# EAGLE board panel_V1_20150125 (EAGLE 6.5.0), part 1 of 3
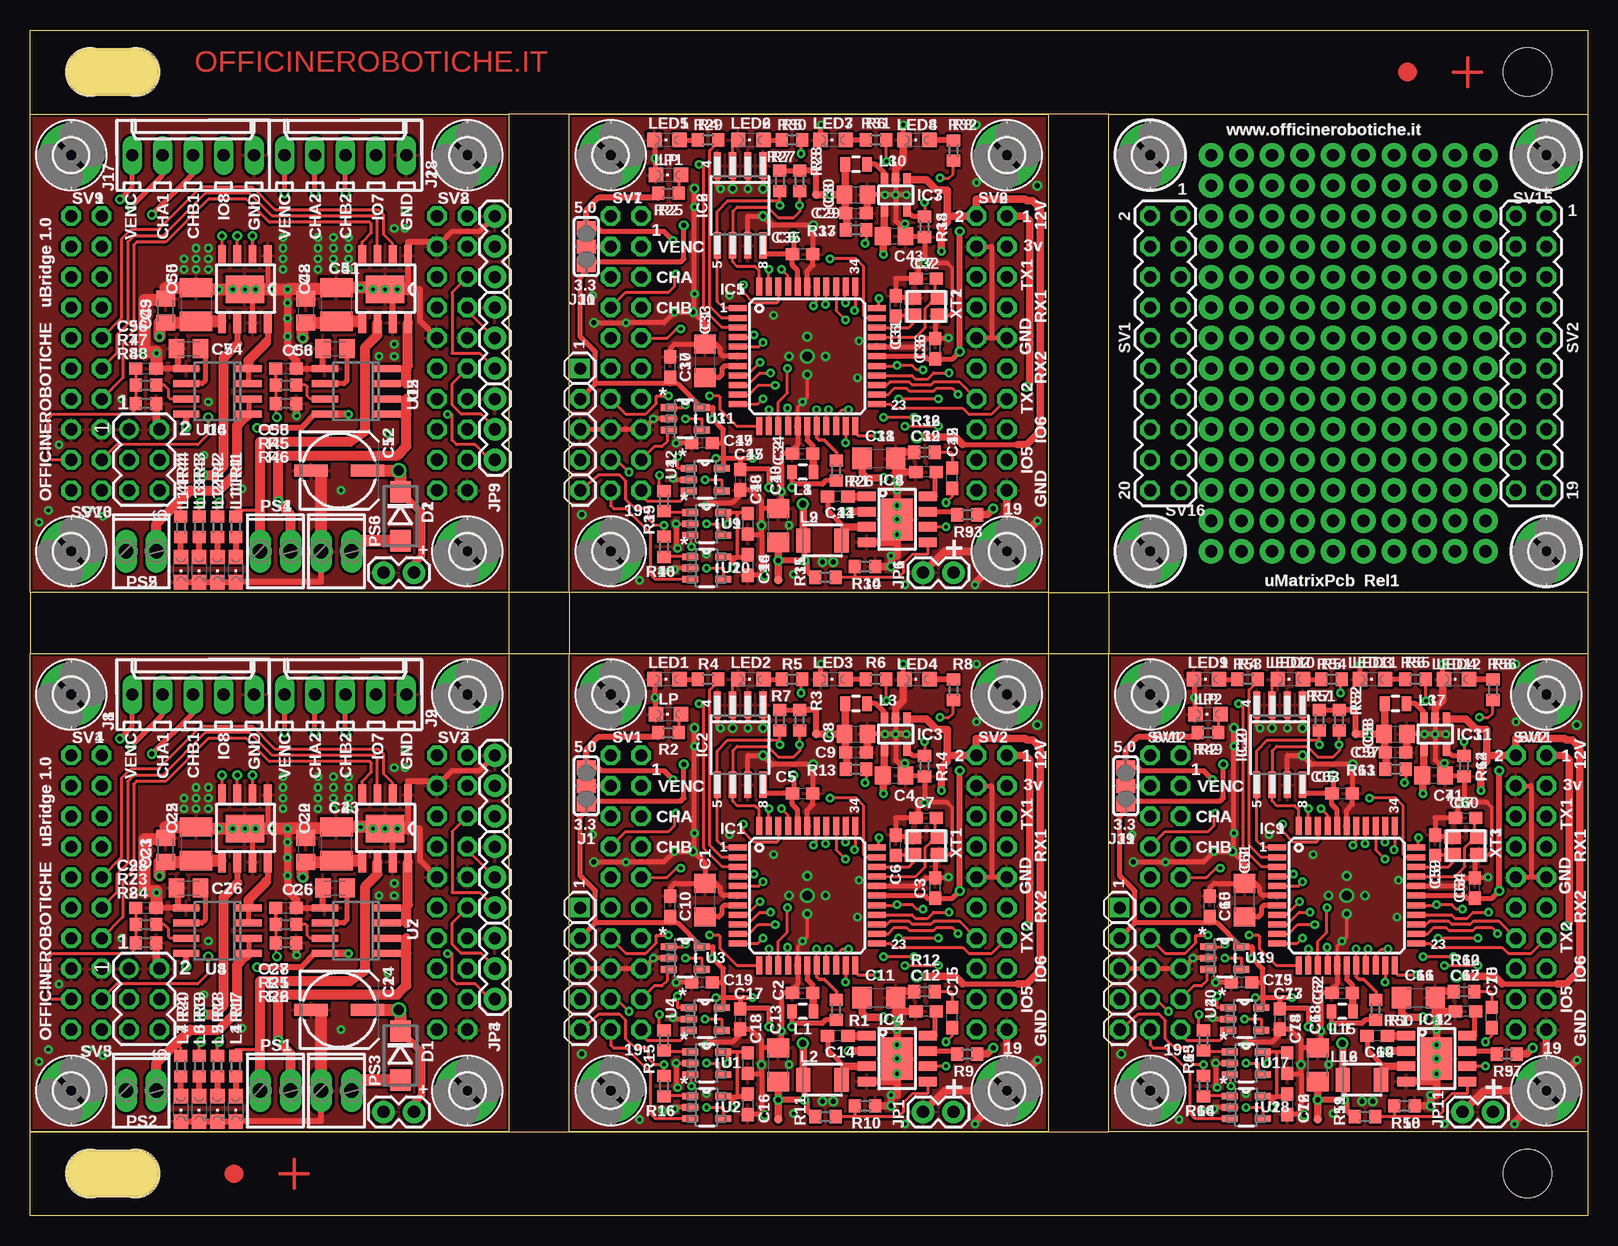
[diagram p0: board, top side]
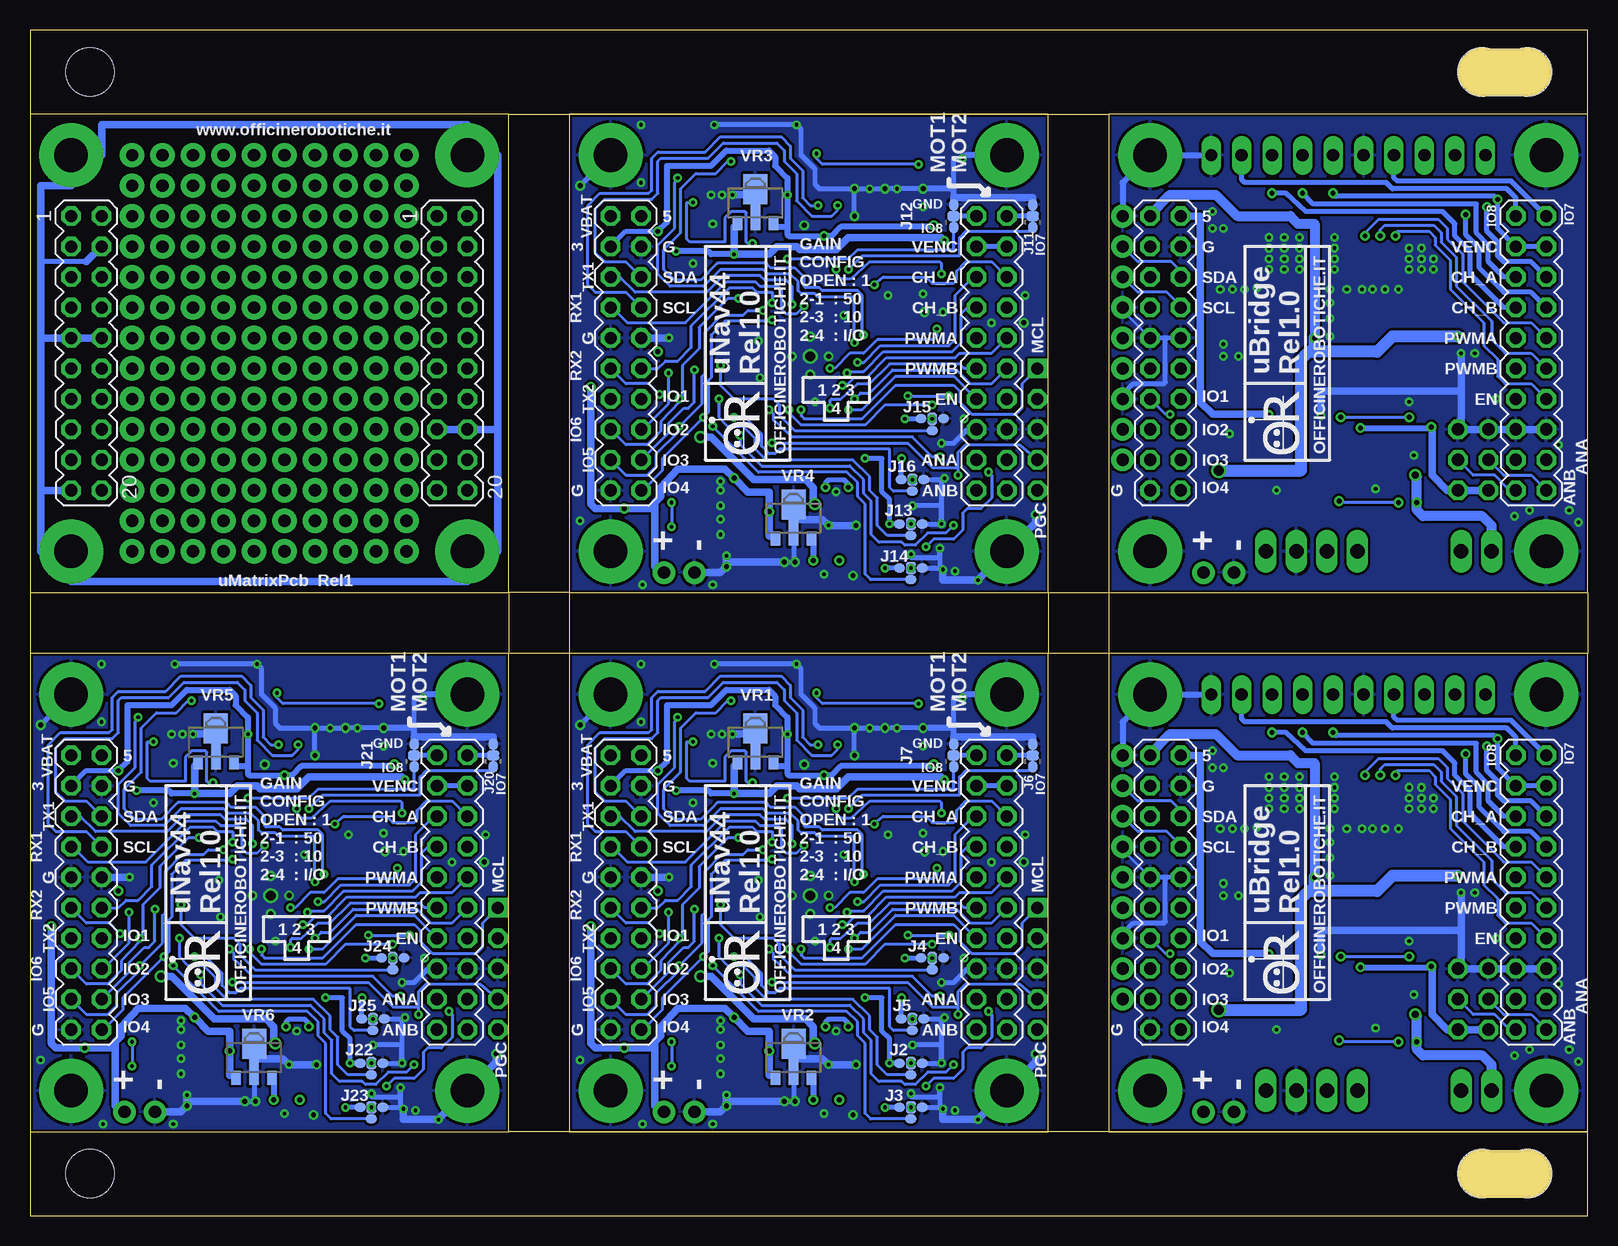
[diagram p1: board, bottom side, seen from below]

Size 129.79 x 98.86 mm. Coordinates in mm from the lower left corner, seen from the top.
Outline: 44.96,46.89 44.96,7.01 84.84,7.01 84.84,46.89
Outline: 44.96,46.89 84.84,46.89
Outline: 0,7.01 39.88,7.01 39.88,46.89
Outline: 0,7.01 0,46.89
Outline: 84.84,51.97 44.96,51.97
Outline: 44.96,51.97 44.96,91.85 84.84,91.85 84.84,51.97
Outline: 0,51.97 0,91.85
Outline: 0,91.85 39.88,91.85
Outline: 39.88,91.85 39.88,51.97
Outline: 129.79,7.01 89.92,7.01
Outline: 89.92,7.01 89.92,46.89
Outline: 89.92,46.89 129.79,46.89
Outline: 129.79,46.89 129.79,7.01
Outline: 89.92,91.85 39.88,91.85
Outline: 0,91.85 0,91.85
Outline: 0,91.85 0,98.86 129.79,98.86 129.79,91.85
Outline: 0,7.01 0,0 129.79,0 129.79,7.01
Outline: 0,7.01 89.92,7.01
Outline: 0,51.97 0,46.89
Outline: 0,46.89 39.88,46.89
Outline: 39.88,46.89 44.96,46.89
Outline: 84.84,46.89 89.92,46.89
Outline: 44.96,51.97 39.88,51.97
Outline: 39.88,51.97 0,51.97
Outline: 39.88,51.97 39.88,46.89
Outline: 44.96,51.97 44.96,46.91
Outline: 84.84,51.97 84.84,46.89
Outline: 129.79,51.97 89.92,51.97
Outline: 89.92,51.97 89.92,91.85
Outline: 89.92,91.85 129.79,91.85
Outline: 129.79,91.85 129.79,51.97
Outline: 84.84,51.97 89.92,51.97
Outline: 89.92,51.97 89.92,46.89
Outline: 129.79,51.97 129.79,46.89
Copper layers (1*16): Top 0.035mm / dielectric 1.5mm / Bottom 0.035mm
Design rules "Pannel": minimum track width 8mil, minimum drill 12mil, track to track 8mil, track to pad 8mil, pad to pad 8mil, via to via 8mil, smd to smd 8mil, copper to edge 8mil, drill to drill 8mil, minimum pad ring 12mil, minimum via ring 8mil, stop-mask expansion 4mil, vias tented up to drill 20mil, thermal gap 10mil
Net classes: 0 default: width 0.254 mm, drill 0.406 mm, clearance 0.178 mm
Holes 4 mm at 124.79,95.35 8.8,95.35 5,95.35 124.79,3.52 8.8,3.52 5,3.52
tRestrict: area 113.3,93.8 to 116.3,96.8; area 118.3,93.8 to 121.3,96.8; area 15.5,2 to 18.5,5; area 20.5,2 to 23.5,5; 2 lines
bRestrict: area 113.3,93.8 to 116.3,96.8; area 118.3,93.8 to 121.3,96.8; area 15.5,2 to 18.5,5; area 20.5,2 to 23.5,5; 2 lines
Milling: 2 lines

## Footprints (pad centres in the part's own frame; a part is rotated, then mirrored left to right if it is on the bottom)
C1206 = smd 1.6 x 1.8: 1 -1.4,0; 2 1.4,0
C0603 = smd 1.1 x 1: 1 -0.85,0; 2 0.85,0
C0805 = smd 1.3 x 1.5: 1 -0.95,0; 2 0.95,0
C0805K = smd 1.3 x 1.6: 1 -1,0; 2 1,0
C3225 = smd 1.6 x 2.7: 1 -1.4,0; 2 1.4,0
UD-6,3X7,7_NICHICON = smd 2.8 x 1: + 2.35,0; - -2.35,0
DO214BA = smd 1.8 x 1.7: A 2.05,0; C -2.05,0
2,8-PAD = drill 2.8 pad 5.334: B2,8 0,0
TQFP44 = smd 1.5 x 0.5: 1 -5.8,4; 2 -5.8,3.2; 3 -5.8,2.4; 4 -5.8,1.6; 5 -5.8,0.8; 6 -5.8,0; 7 -5.8,-0.8; 8 -5.8,-1.6; 9 -5.8,-2.4; 10 -5.8,-3.2; 11 -5.8,-4; 23 5.8,-4; 24 5.8,-3.2; 25 5.8,-2.4; 26 5.8,-1.6; 27 5.8,-0.8; 28 5.8,0; 29 5.8,0.8; 30 5.8,1.6; 31 5.8,2.4; 32 5.8,3.2; 33 5.8,4 | smd 0.5 x 1.5: 12 -4,-5.8; 13 -3.2,-5.8; 14 -2.4,-5.8; 15 -1.6,-5.8; 16 -0.8,-5.8; 17 0,-5.8; 18 0.8,-5.8; 19 1.6,-5.8; 20 2.4,-5.8; 21 3.2,-5.8; 22 4,-5.8; 34 4,5.8; 35 3.2,5.8; 36 2.4,5.8; 37 1.6,5.8; 38 0.8,5.8; 39 0,5.8; 40 -0.8,5.8; 41 -1.6,5.8; 42 -2.4,5.8; 43 -3.2,5.8; 44 -4,5.8
SO-08M = smd 0.6 x 2.2: 1 -1.905,-3.33; 2 -0.635,-3.33; 3 0.635,-3.33; 4 1.905,-3.33; 5 1.905,3.33; 6 0.635,3.33; 7 -0.635,3.33; 8 -1.905,3.33
SOT-23-5 = smd 0.61 x 0.991: 1 -0.94,-1.308; 2 0,-1.308; 3 0.94,-1.308; 4 0.94,1.308; 5 -0.94,1.308
SO-8EP = smd 0.802 x 1.505: 1 -1.905,-2.54; 2 -0.635,-2.54; 3 0.635,-2.54; 4 1.905,-2.54; 5 1.905,2.54; 6 0.635,2.54; 7 -0.635,2.54; 8 -1.905,2.54 | smd 3.501 x 2.613: PAD 0,0
1X05-S = drill 1.016 square: 1 -5.08,0 | drill 1.016 octagon: 2 -2.54,0; 3 0,0; 4 2.54,0; 5 5.08,0
SJ_2 = smd 1.168 x 1.6: 1 -1.524,0; 2 0,0; 3 1.524,0
C0R-JUMP-4 = smd 0.8 x 0.95: 1 0,0.94; 3 0,-0.94; 4 -0.965,0 | smd 1 x 0.8: 2 0,0
C0R-JMP = smd 0.8 x 1: 1 0,0.938; 3 0,-0.938 | smd 1 x 0.8: 2 0,0
6410-05 = drill 1.016 long: 1 5.08,0; 2 2.54,0; 3 0,0; 4 -2.54,0; 5 -5.08,0
1X02 = drill 1.016 pad 1.88: 1 0,0; 2 2.54,0
1X03 = drill 1.016 pad 1.88: 1 0,0; 2 2.54,0; 3 5.08,0
0805 = smd 0.8 x 1.2: 1 -0.9,0; 2 0.9,0
1210 = smd 1.2 x 2: 1 -1.6,0; 2 1.6,0
CHIPLED_0805 = smd 1.2 x 1.2: A 0,-1.05; C 0,1.05
2POL254 = drill 1.2 long: 1 -1.27,0; 2 1.27,0
R0603 = smd 1 x 1.1: 1 -0.85,0; 2 0.85,0
MA10-2 = drill 1.016 octagon: 1 -11.43,-1.27; 2 -11.43,1.27; 3 -8.89,-1.27; 4 -8.89,1.27; 5 -6.35,-1.27; 6 -6.35,1.27; 7 -3.81,-1.27; 8 -3.81,1.27; 9 -1.27,-1.27; 10 -1.27,1.27; 11 1.27,-1.27; 12 1.27,1.27; 13 3.81,-1.27; 14 3.81,1.27; 15 6.35,-1.27; 16 6.35,1.27; 17 8.89,-1.27; 18 8.89,1.27; 19 11.43,-1.27; 20 11.43,1.27
MA03-2 = drill 1.016: 1 -2.54,-1.27 | drill 1.016 octagon: 2 -2.54,1.27; 3 0,-1.27; 4 0,1.27; 5 2.54,-1.27; 6 2.54,1.27
TP07R = smd 0.7 x 0.7: TP 0,0
SOT95P300X145-5N = smd 1.321 x 0.559: 1 -1.372,0.94; 2 -1.372,0; 3 -1.372,-0.94; 4 1.372,-0.94; 5 1.372,0.94
8SOICN = smd 0.65 x 1.75: 1 -1.905,-2.8; 2 -0.635,-2.8; 3 0.635,-2.8; 4 1.905,-2.8; 5 1.905,2.8; 6 0.635,2.8; 7 -0.635,2.8; 8 -1.905,2.8 | smd 3.2 x 2.3: PAD 0,0
SO08 = smd 0.6 x 2.2: 1 -1.905,-2.6; 2 -0.635,-2.6; 3 0.635,-2.6; 4 1.905,-2.6; 5 1.905,2.6; 6 0.635,2.6; 7 -0.635,2.6; 8 -1.905,2.6
SOT89 = smd 0.8 x 1.2: 1 -1.5,-1.6; 3 1.5,-1.6 | smd 0.8 x 2.3: 2 0,-1.05 | smd 2 x 2.5: 4 0,1.25
CTS_32X25 = smd 1.4 x 1.2: 1 -1.1,-0.7; 2 1.1,-0.7; 3 1.1,0.8; 4 -1.1,0.8

## Placement (x,y rotation side)
C1  10uf  [C1206]  56.26,26.31 90 top
C2  100nF/S  [C0603]  64.39,18.57 0 top
C3  100nF/S  [C0603]  75.44,27.33 90 top
C4  10uF 10V X7R  [C0805]  72.01,36.73 0 top
C5  100nF/S  [C0603]  64.39,35.2 180 top
C6  18pf  [C0603]  72.14,30.89 90 top
C7  18pf  [C0603]  74.68,33.17 0 top
C8  10uF 10V X7R  [C0805]  68.83,40.16 0 top
C9  100nF/S  [C0603]  68.83,38.63 0 top
C10  100nF/S  [C0603]  53.34,25.81 90 top
C11  22uF 35V 20% JB 1206  [C1206]  70.74,18.19 0 top
C12  100nF/S2  [C0603]  74.68,17.04 180 top
C13  22uf  [C1206]  62.36,12.6 90 top
C14  10nF/S  [C0603]  67.31,15.01 180 top
C15  10nF/S2  [C0603]  76.84,16.54 90 top
C16  100nF/S  [C0603]  59.82,9.3 270 top
C17  100nF/S  [C0603]  59.18,16.41 270 top
C18  100nF/S  [C0603]  59.82,12.73 270 top
C19  100nF/S  [C0603]  56.01,19.46 180 top
C20  220nF  [C0805K]  22.99,30.51 270 top
C21  220nF  [C0805K]  11.3,30.51 270 top
C22  10uF/S6 50V  [C3225]  13.84,31.01 270 top
C23  10uF/S6 50V  [C3225]  25.53,31.01 270 top
C24  PCE4554CT-ND  [UD-6,3X7,7_NICHICON]  25.78,17.17 0 top
C25  1nF  [C0805K]  25.4,27.33 180 top
C26  1nF  [C0805K]  13.21,27.33 180 top
C27  100nF/S2  [C0603]  21.34,25.68 0 top
C28  100nF/S2  [C0603]  9.65,25.68 0 top
C29  100nF/S  [C0603]  68.83,83.59 0 top
C30  10uF 10V X7R  [C0805]  68.83,85.12 0 top
C31  18pf  [C0603]  72.14,75.84 90 top
C32  18pf  [C0603]  74.68,78.13 0 top
C33  10uf  [C1206]  56.26,71.27 90 top
C34  100nF/S  [C0603]  64.39,63.53 0 top
C35  100nF/S  [C0603]  64.39,80.16 180 top
C36  100nF/S  [C0603]  75.44,72.29 90 top
C37  100nF/S  [C0603]  53.34,70.76 90 top
C38  22uF 35V 20% JB 1206  [C1206]  70.74,63.14 0 top
C39  100nF/S2  [C0603]  74.68,62 180 top
C40  22uf  [C1206]  62.36,57.56 90 top
C41  10nF/S  [C0603]  67.31,59.97 180 top
C42  10nF/S2  [C0603]  76.84,61.49 90 top
C43  10uF 10V X7R  [C0805]  72.01,81.69 0 top
C44  100nF/S  [C0603]  59.82,54.25 270 top
C45  100nF/S  [C0603]  59.18,61.37 270 top
C46  100nF/S  [C0603]  59.82,57.68 270 top
C47  100nF/S  [C0603]  56.01,64.41 180 top
C48  220nF  [C0805K]  22.99,75.46 270 top
C49  220nF  [C0805K]  11.3,75.46 270 top
C50  10uF/S6 50V  [C3225]  13.84,75.97 270 top
C51  10uF/S6 50V  [C3225]  25.53,75.97 270 top
C52  PCE4554CT-ND  [UD-6,3X7,7_NICHICON]  25.78,62.13 0 top
C53  1nF  [C0805K]  25.4,72.29 180 top
C54  1nF  [C0805K]  13.21,72.29 180 top
C55  100nF/S2  [C0603]  21.34,70.64 0 top
C56  100nF/S2  [C0603]  9.65,70.64 0 top
C57  100nF/S  [C0603]  113.79,38.63 0 top
C58  10uF 10V X7R  [C0805]  113.79,40.16 0 top
C59  18pf  [C0603]  117.09,30.89 90 top
C60  18pf  [C0603]  119.63,33.17 0 top
C61  10uf  [C1206]  101.22,26.31 90 top
C62  100nF/S  [C0603]  109.35,18.57 0 top
C63  100nF/S  [C0603]  109.35,35.2 180 top
C64  100nF/S  [C0603]  120.4,27.33 90 top
C65  100nF/S  [C0603]  98.3,25.81 90 top
C66  22uF 35V 20% JB 1206  [C1206]  115.7,18.19 0 top
C67  100nF/S2  [C0603]  119.63,17.04 180 top
C68  22uf  [C1206]  107.32,12.6 90 top
C69  10nF/S  [C0603]  112.27,15.01 180 top
C70  10nF/S2  [C0603]  121.79,16.54 90 top
C71  10uF 10V X7R  [C0805]  116.97,36.73 0 top
C72  100nF/S  [C0603]  104.78,9.3 270 top
C73  100nF/S  [C0603]  104.14,16.41 270 top
C74  100nF/S  [C0603]  104.78,12.73 270 top
C75  100nF/S  [C0603]  100.97,19.46 180 top
D1  ES1G-E2  [DO214BA]  30.86,13.36 270 top
D2  ES1G-E2  [DO214BA]  30.86,58.32 270 top
H1  MOUNT-PAD-ROUND2.8  [2,8-PAD]  48.39,10.44 0 top
H2  MOUNT-PAD-ROUND2.8  [2,8-PAD]  81.41,10.44 0 top
H3  MOUNT-PAD-ROUND2.8  [2,8-PAD]  81.41,43.46 0 top
H4  MOUNT-PAD-ROUND2.8  [2,8-PAD]  48.39,43.46 0 top
H5  MOUNT-PAD-ROUND2.8  [2,8-PAD]  3.43,10.44 0 top
H6  MOUNT-PAD-ROUND2.8  [2,8-PAD]  36.45,10.44 0 top
H7  MOUNT-PAD-ROUND2.8  [2,8-PAD]  36.45,43.46 0 top
H8  MOUNT-PAD-ROUND2.8  [2,8-PAD]  3.43,43.46 0 top
H9  MOUNT-PAD-ROUND2.8  [2,8-PAD]  48.39,55.4 0 top
H10  MOUNT-PAD-ROUND2.8  [2,8-PAD]  81.41,55.4 0 top
H11  MOUNT-PAD-ROUND2.8  [2,8-PAD]  81.41,88.42 0 top
H12  MOUNT-PAD-ROUND2.8  [2,8-PAD]  48.39,88.42 0 top
H13  MOUNT-PAD-ROUND2.8  [2,8-PAD]  3.43,55.4 0 top
H14  MOUNT-PAD-ROUND2.8  [2,8-PAD]  36.45,55.4 0 top
H15  MOUNT-PAD-ROUND2.8  [2,8-PAD]  36.45,88.42 0 top
H16  MOUNT-PAD-ROUND2.8  [2,8-PAD]  3.43,88.42 0 top
H17  MOUNT-PAD-ROUND2.8  [2,8-PAD]  93.35,10.44 0 top
H18  MOUNT-PAD-ROUND2.8  [2,8-PAD]  126.37,10.44 0 top
H19  MOUNT-PAD-ROUND2.8  [2,8-PAD]  126.37,43.46 0 top
H20  MOUNT-PAD-ROUND2.8  [2,8-PAD]  93.35,43.46 0 top
H25  MOUNT-PAD-ROUND2.8  [2,8-PAD]  93.35,55.4 0 top
H26  MOUNT-PAD-ROUND2.8  [2,8-PAD]  126.37,55.4 0 top
H27  MOUNT-PAD-ROUND2.8  [2,8-PAD]  126.37,88.42 0 top
H28  MOUNT-PAD-ROUND2.8  [2,8-PAD]  93.35,88.42 0 top
IC1  DSPIC33FJ128MC  [TQFP44]  64.77,26.7 0 top
IC2  24LC024  [SO-08M]  59.18,39.27 180 top
IC3  AP3417CK-3.3TRG1  [SOT-23-5]  72.14,40.16 180 top
IC4  AP6503SP-13  [SO-8EP]  72.26,13.11 270 top
IC5  DSPIC33FJ128MC  [TQFP44]  64.77,71.65 0 top
IC6  24LC024  [SO-08M]  59.18,84.23 180 top
IC7  AP3417CK-3.3TRG1  [SOT-23-5]  72.14,85.12 180 top
IC8  AP6503SP-13  [SO-8EP]  72.26,58.06 270 top
IC9  DSPIC33FJ128MC  [TQFP44]  109.73,26.7 0 top
IC10  24LC024  [SO-08M]  104.14,39.27 180 top
IC11  AP3417CK-3.3TRG1  [SOT-23-5]  117.09,40.16 180 top
IC12  AP6503SP-13  [SO-8EP]  117.22,13.11 270 top
ICSP  [1X05-S]  45.85,20.6 270 top
ICSP1  [1X05-S]  45.85,65.56 270 top
ICSP2  [1X05-S]  90.81,20.6 270 top
J1  [SJ_2]  46.36,35.84 90 top
J2  [C0R-JUMP-4]  56.39,12.73 90 bottom
J3  [C0R-JUMP-4]  56.39,9.04 90 bottom
J4  [C0R-JUMP-4]  54.61,21.49 90 bottom
J5  [C0R-JUMP-4]  56.26,16.41 90 bottom
J6  0R-JUMPC  [C0R-JMP]  46.23,38.38 180 bottom
J7  0R-JUMPC  [C0R-JMP]  52.83,38.38 180 bottom
J8  22-27-2051-05  [6410-05]  13.59,43.46 0 top
J9  22-27-2051-05  [6410-05]  26.29,43.46 0 top
J10  [SJ_2]  46.36,80.8 90 top
J11  0R-JUMPC  [C0R-JMP]  46.23,83.34 180 bottom
J12  0R-JUMPC  [C0R-JMP]  52.83,83.34 180 bottom
J13  [C0R-JUMP-4]  56.39,57.68 90 bottom
J14  [C0R-JUMP-4]  56.39,54 90 bottom
J15  [C0R-JUMP-4]  54.61,66.45 90 bottom
J16  [C0R-JUMP-4]  56.26,61.37 90 bottom
J17  22-27-2051-05  [6410-05]  13.59,88.42 0 top
J18  22-27-2051-05  [6410-05]  26.29,88.42 0 top
J19  [SJ_2]  91.31,35.84 90 top
J20  0R-JUMPC  [C0R-JMP]  91.19,38.38 180 bottom
J21  0R-JUMPC  [C0R-JMP]  97.79,38.38 180 bottom
J22  [C0R-JUMP-4]  101.35,12.73 90 bottom
J23  [C0R-JUMP-4]  101.35,9.04 90 bottom
J24  [C0R-JUMP-4]  99.57,21.49 90 bottom
J25  [C0R-JUMP-4]  101.22,16.41 90 bottom
JP1  M02PTH  [1X02]  74.42,8.66 0 top
JP2  M02PTH  [1X02]  29.46,8.66 0 top
JP3  [1X03]  38.74,25.68 90 top
JP4  [1X03]  38.74,18.06 90 top
JP5  [1X03]  38.74,33.3 90 top
JP6  M02PTH  [1X02]  74.42,53.62 0 top
JP7  M02PTH  [1X02]  29.46,53.62 0 top
JP8  [1X03]  38.74,70.64 90 top
JP9  [1X03]  38.74,63.02 90 top
JP10  [1X03]  38.74,78.26 90 top
JP11  M02PTH  [1X02]  119.38,8.66 0 top
L1  22 uH  [0805]  64.39,17.04 180 top
L2  10uH_520mA  [1210]  66.04,11.33 180 top
L3  ASMPH-0805-2R2M-T  [0805]  68.83,42.7 180 top
L4  LED0805-YEL/S  [CHIPLED_0805]  17.15,8.92 180 top
L5  LED0805-GRN/S  [CHIPLED_0805]  15.62,8.92 180 top
L6  LED0805-YEL/S  [CHIPLED_0805]  14.1,8.92 180 top
L7  LED0805-GRN/S  [CHIPLED_0805]  12.57,8.92 180 top
L8  22 uH  [0805]  64.39,62 180 top
L9  10uH_520mA  [1210]  66.04,56.29 180 top
L10  ASMPH-0805-2R2M-T  [0805]  68.83,87.66 180 top
L11  LED0805-YEL/S  [CHIPLED_0805]  17.15,53.87 180 top
L12  LED0805-GRN/S  [CHIPLED_0805]  15.62,53.87 180 top
L13  LED0805-YEL/S  [CHIPLED_0805]  14.1,53.87 180 top
L14  LED0805-GRN/S  [CHIPLED_0805]  12.57,53.87 180 top
L15  22 uH  [0805]  109.35,17.04 180 top
L16  10uH_520mA  [1210]  111,11.33 180 top
L17  ASMPH-0805-2R2M-T  [0805]  113.79,42.7 180 top
LED1  LED0805-GRN/S  [CHIPLED_0805]  53.09,44.73 90 top
LED2  LED0805-GRN/S  [CHIPLED_0805]  60.07,44.73 90 top
LED3  LED0805-YEL/S  [CHIPLED_0805]  66.93,44.73 90 top
LED4  LED0805-RED/S  [CHIPLED_0805]  73.91,44.73 90 top
LED5  LED0805-GRN/S  [CHIPLED_0805]  53.09,89.69 90 top
LED6  LED0805-GRN/S  [CHIPLED_0805]  60.07,89.69 90 top
LED7  LED0805-YEL/S  [CHIPLED_0805]  66.93,89.69 90 top
LED8  LED0805-RED/S  [CHIPLED_0805]  73.91,89.69 90 top
LED9  LED0805-GRN/S  [CHIPLED_0805]  98.04,44.73 90 top
LED10  LED0805-GRN/S  [CHIPLED_0805]  105.03,44.73 90 top
LED11  LED0805-YEL/S  [CHIPLED_0805]  111.89,44.73 90 top
LED12  LED0805-RED/S  [CHIPLED_0805]  118.87,44.73 90 top
LP  Green  [CHIPLED_0805]  53.21,41.81 90 top
LP1  Green  [CHIPLED_0805]  53.21,86.77 90 top
LP2  Green  [CHIPLED_0805]  98.17,41.81 90 top
PS1  [2POL254]  20.45,10.44 0 top
PS2  [2POL254]  9.27,10.44 0 top
PS3  [2POL254]  25.53,10.44 0 top
PS4  [2POL254]  20.45,55.4 0 top
PS5  [2POL254]  9.27,55.4 0 top
PS6  [2POL254]  25.53,55.4 0 top
R1  10K0/S 1%  [R0603]  67.18,17.17 270 top
R2  1K/S 1%  [R0603]  53.21,40.28 180 top
R3  3K3/S 1%  [R0603]  64.14,41.3 270 top
R4  1K/S 1%  [R0603]  56.52,44.73 180 top
R5  1K/S 1%  [R0603]  63.5,44.73 180 top
R6  1K/S 1%  [R0603]  70.49,44.73 180 top
R7  3K3/S 1%  [R0603]  62.48,41.3 270 top
R8  1K/S 1%  [R0603]  76.96,43.84 90 top
R9  100K0/S2 1%  [R0603]  78.11,13.49 0 top
R10  10K0/S 1%  [R0603]  69.6,9.17 0 top
R11  45K3/S 1%  [R0603]  66.29,8.28 180 top
R12  10K0/S 1%  [R0603]  74.55,18.69 0 top
R13  450K/S 1%  [R0603]  68.83,37.24 180 top
R14  100K/S 1%  [R0603]  74.55,37.49 90 top
R15  10K0/S 1%  [R0603]  52.83,14.63 270 top
R16  10K0/S 1%  [R0603]  52.83,10.82 270 top
R17  1K/S 1%  [R0603]  17.15,12.47 270 top
R18  1K/S 1%  [R0603]  15.62,12.47 270 top
R19  1K/S 1%  [R0603]  14.1,12.47 270 top
R20  1K/S 1%  [R0603]  12.57,12.47 270 top
R21  6K49/S 1%  [R0603]  21.34,24.28 0 top
R22  3K3/S 1%  [R0603]  21.34,22.76 180 top
R23  6K49/S 1%  [R0603]  9.65,24.28 0 top
R24  3K3/S 1%  [R0603]  9.65,22.76 180 top
R25  1K/S 1%  [R0603]  53.21,85.24 180 top
R26  10K0/S 1%  [R0603]  67.18,62.13 270 top
R27  3K3/S 1%  [R0603]  62.48,86.26 270 top
R28  3K3/S 1%  [R0603]  64.14,86.26 270 top
R29  1K/S 1%  [R0603]  56.52,89.69 180 top
R30  1K/S 1%  [R0603]  63.5,89.69 180 top
R31  1K/S 1%  [R0603]  70.49,89.69 180 top
R32  1K/S 1%  [R0603]  76.96,88.8 90 top
R33  100K0/S2 1%  [R0603]  78.11,58.45 0 top
R34  10K0/S 1%  [R0603]  69.6,54.13 0 top
R35  45K3/S 1%  [R0603]  66.29,53.24 180 top
R36  10K0/S 1%  [R0603]  74.55,63.65 0 top
R37  450K/S 1%  [R0603]  68.83,82.19 180 top
R38  100K/S 1%  [R0603]  74.55,82.45 90 top
R39  10K0/S 1%  [R0603]  52.83,59.59 270 top
R40  10K0/S 1%  [R0603]  52.83,55.78 270 top
R41  1K/S 1%  [R0603]  17.15,57.43 270 top
R42  1K/S 1%  [R0603]  15.62,57.43 270 top
R43  1K/S 1%  [R0603]  14.1,57.43 270 top
R44  1K/S 1%  [R0603]  12.57,57.43 270 top
R45  6K49/S 1%  [R0603]  21.34,69.24 0 top
R46  3K3/S 1%  [R0603]  21.34,67.72 180 top
R47  6K49/S 1%  [R0603]  9.65,69.24 0 top
R48  3K3/S 1%  [R0603]  9.65,67.72 180 top
R49  1K/S 1%  [R0603]  98.17,40.28 180 top
R50  10K0/S 1%  [R0603]  112.14,17.17 270 top
R51  3K3/S 1%  [R0603]  107.44,41.3 270 top
R52  3K3/S 1%  [R0603]  109.09,41.3 270 top
R53  1K/S 1%  [R0603]  101.47,44.73 180 top
R54  1K/S 1%  [R0603]  108.46,44.73 180 top
R55  1K/S 1%  [R0603]  115.44,44.73 180 top
R56  1K/S 1%  [R0603]  121.92,43.84 90 top
R57  100K0/S2 1%  [R0603]  123.06,13.49 0 top
R58  10K0/S 1%  [R0603]  114.55,9.17 0 top
R59  45K3/S 1%  [R0603]  111.25,8.28 180 top
R60  10K0/S 1%  [R0603]  119.51,18.69 0 top
R61  450K/S 1%  [R0603]  113.79,37.24 180 top
R62  100K/S 1%  [R0603]  119.51,37.49 90 top
R63  10K0/S 1%  [R0603]  97.79,14.63 270 top
R64  10K0/S 1%  [R0603]  97.79,10.82 270 top
SV1  [MA10-2]  49.66,26.95 270 bottom
SV2  [MA10-2]  80.14,26.95 270 bottom
SV3  [MA10-2]  35.18,26.95 270 bottom
SV4  [MA10-2]  4.7,26.95 270 bottom
SV5  [MA03-2]  9.53,18.06 270 top
SV6  [MA10-2]  80.14,71.91 270 bottom
SV7  [MA10-2]  49.66,71.91 270 bottom
SV8  [MA10-2]  35.18,71.91 270 bottom
SV9  [MA10-2]  4.7,71.91 270 bottom
SV10  [MA03-2]  9.53,63.02 270 top
SV11  [MA10-2]  125.1,26.95 270 bottom
SV12  [MA10-2]  94.62,26.95 270 bottom
SV15  [MA10-2]  125.1,71.91 270 bottom
SV16  [MA10-2]  94.62,71.91 270 bottom
TP1  PTR1TP07R  [TP07R]  65.53,40.16 0 top
TP2  PTR1TP07R  [TP07R]  62.36,8.03 0 top
TP3  PTR1TP07R  [TP07R]  65.53,85.12 0 top
TP4  PTR1TP07R  [TP07R]  62.36,52.98 0 top
TP5  PTR1TP07R  [TP07R]  110.49,40.16 0 top
TP6  PTR1TP07R  [TP07R]  107.32,8.03 0 top
U1  MCP6G01T-E/OT  [SOT95P300X145-5N]  56.39,12.73 0 top
U2  MCP6G01T-E/OT  [SOT95P300X145-5N]  56.39,9.04 0 top
U3  MCP6G01T-E/OT  [SOT95P300X145-5N]  54.61,21.49 0 top
U4  MCP6G01T-E/OT  [SOT95P300X145-5N]  56.26,16.41 0 top
U5  A4950  [8SOICN]  29.59,32.28 180 top
U6  A4950  [8SOICN]  17.91,32.28 180 top
U7  ACS723  [SO08]  27.18,23.77 90 top
U8  ACS723  [SO08]  15.62,23.77 90 top
U9  MCP6G01T-E/OT  [SOT95P300X145-5N]  56.39,57.68 0 top
U10  MCP6G01T-E/OT  [SOT95P300X145-5N]  56.39,54 0 top
U11  MCP6G01T-E/OT  [SOT95P300X145-5N]  54.61,66.45 0 top
U12  MCP6G01T-E/OT  [SOT95P300X145-5N]  56.26,61.37 0 top
U13  A4950  [8SOICN]  29.59,77.24 180 top
U14  A4950  [8SOICN]  17.91,77.24 180 top
U15  ACS723  [SO08]  27.18,68.73 90 top
U16  ACS723  [SO08]  15.62,68.73 90 top
U17  MCP6G01T-E/OT  [SOT95P300X145-5N]  101.35,12.73 0 top
U18  MCP6G01T-E/OT  [SOT95P300X145-5N]  101.35,9.04 0 top
U19  MCP6G01T-E/OT  [SOT95P300X145-5N]  99.57,21.49 0 top
U20  MCP6G01T-E/OT  [SOT95P300X145-5N]  101.22,16.41 0 top
VR1  MCP1754S-3.3V  [SOT89]  69.34,39.4 0 bottom
VR2  MCP1754S-5.0V  [SOT89]  66.17,13.11 0 bottom
VR3  MCP1754S-3.3V  [SOT89]  69.34,84.35 0 bottom
VR4  MCP1754S-5.0V  [SOT89]  66.17,58.06 0 bottom
VR5  MCP1754S-3.3V  [SOT89]  114.3,39.4 0 bottom
VR6  MCP1754S-5.0V  [SOT89]  111.13,13.11 0 bottom
XT1  [CTS_32X25]  74.68,30.89 180 top
XT2  [CTS_32X25]  74.68,75.84 180 top
XT3  [CTS_32X25]  119.63,30.89 180 top

## Library data of the parts
C1-C21 C24-C49 C52-C75 R1-R64 = rcl
C22 C23 C50 C51 = rcl; CASE: C3225 [EIA CC1210]; CODE: CL32B106KBJNNNE; KATODO: 10.1050.0010; TEMPERATURE: X7S
D1 D2 = diode
H1-H20 H25-H28 = holes
IC1 IC5 IC9 = microchip-dspic33fjxxmc
IC2 IC6 IC10 = microchip
IC3 IC4 IC7 IC8 IC11 IC12 J2-J5 J13-J16 J22-J25 U5-U8 U13-U16 XT1-XT3 = OfficineRobotiche
ICSP ICSP1 ICSP2 = pinhead-2
J1 J10 J19 = jumper
J6 J7 J11 J12 J20 J21 = jump-0r-smd
J8 J9 J17 J18 = con-molex
JP1-JP11 = SparkFun-Connectors
L1-L3 L8-L10 L15-L17 = SparkFun-Passives
L4-L7 L11-L14 LED1-LED12 LP LP1 LP2 = led
PS1-PS6 VR1-VR6 = Personale
SV1-SV4 SV6-SV9 SV11 SV12 = OfficineRobotiche; OC_FARNELL: unknown; OC_NEWARK: unknown
SV5 SV10 SV15 SV16 = con-lstb; OC_FARNELL: unknown; OC_NEWARK: unknown
TP1-TP6 = testpad
U1-U4 U9-U12 U17-U20 = OfficineRobotiche; MPN: MCP6G01T-E/OT; OC_FARNELL: 1332148; OC_NEWARK: 34M7463; PACKAGE: SOT23-5; SUPPLIER: Microchip

## Nets
+3V1: SV3.3
+3V2: C29.1 C30.1 C35.2 C36.1 C37.1 C44.1 C45.1 C46.1 C47.1 IC5.28 IC5.40 IC6.8 ICSP1.2 J10.1 J13.1 J14.1 J15.1 J16.1 L8.2 L10.2 R26.2 R27.1 R28.1 R37.2 SV6.3 TP3.TP U9.5 U10.5 U11.5 U12.5 VR3.3
+3V3: C3.1 C5.2 C8.1 C9.1 C10.1 C16.1 C17.1 C18.1 C19.1 IC1.28 IC1.40 IC2.8 ICSP.2 J1.1 J2.1 J3.1 J4.1 J5.1 L1.2 L3.2 R1.2 R3.1 R7.1 R13.2 SV2.3 TP1.TP U1.5 U2.5 U3.5 U4.5 VR1.3
+3V4: SV8.3
+3V5: C57.1 C58.1 C63.2 C64.1 C65.1 C72.1 C73.1 C74.1 C75.1 IC9.28 IC9.40 IC10.8 ICSP2.2 J19.1 J22.1 J23.1 J24.1 J25.1 L15.2 L17.2 R50.2 R51.1 R52.1 R61.2 SV11.3 TP5.TP U17.5 U18.5 U19.5 U20.5 VR5.3
+3V7: SV15.3
+5V: C4.1 C13.1 IC3.1 IC3.4 J1.3 L2.2 R2.2 R11.2 SV2.2 TP2.TP VR1.1 VR2.3
+5V1: SV3.2 SV5.5 SV5.6 U7.8 U8.8
+5V2: C40.1 C43.1 IC7.1 IC7.4 J10.3 L9.2 R25.2 R35.2 SV6.2 TP4.TP VR3.1 VR4.3
+5V3: SV8.2 SV10.5 SV10.6 U15.8 U16.8
+5V4: C68.1 C71.1 IC11.1 IC11.4 J19.3 L16.2 R49.2 R59.2 SV11.2 TP6.TP VR5.1 VR6.3
+5V6: SV15.2
+12V: C11.1 IC4.2 JP1.2 R9.2 SV2.1 VR2.1
+12V1: C20.2 C21.2 C22.2 C23.2 C24.+ D1.C JP2.2 SV3.1 U5.5 U6.5
+12V2: C38.1 IC8.2 JP6.2 R33.2 SV6.1 VR4.1
+12V3: C48.2 C49.2 C50.2 C51.2 C52.+ D2.C JP7.2 SV8.1 U13.5 U14.5
+12V4: C66.1 IC12.2 JP11.2 R57.2 SV11.1 VR6.1
+12V6: SV15.1
ANA1: IC1.19 U3.1
ANA2: SV1.18 U1.3
ANA2/PGD: IC1.21 ICSP.4 R15.1
ANA2/PGD1: IC5.21 ICSP1.4 R39.1
ANA2/PGD2: IC9.21 ICSP2.4 R63.1
ANA3: C27.1 R21.1 R22.2 SV4.17
ANA4: C28.1 R23.1 R24.2 SV4.18
ANA5: IC5.19 U11.1
ANA6: SV7.18 U9.3
ANA7: C55.1 R45.1 R46.2 SV9.17
ANA8: C56.1 R47.1 R48.2 SV9.18
ANA9: IC9.19 U19.1
ANA10: SV12.18 U17.3
ANA13: SV16.18
ANB1: IC1.20 U4.1
ANB2: SV1.20 U2.3
ANB2/PGC: IC1.22 ICSP.5 R16.1
ANB2/PGC1: IC5.22 ICSP1.5 R40.1
ANB2/PGC2: IC9.22 ICSP2.5 R64.1
ANB3: SV4.19 SV5.4
ANB4: SV4.20 SV5.3
ANB5: IC5.20 U12.1
ANB6: SV7.20 U10.3
ANB7: SV9.19 SV10.4
ANB8: SV9.20 SV10.3
ANB9: IC9.20 U20.1
ANB10: SV12.20 U18.3
ANB13: SV16.20
AVDD: C2.2 IC1.17 L1.1
AVDD1: C34.2 IC5.17 L8.1
AVDD2: C62.2 IC9.17 L15.1
CHA1: IC1.8 SV1.5
CHA2: IC1.42 SV1.6
CHA3: J9.4 SV4.5
CHA4: J8.4 SV4.6
CHA5: IC5.8 SV7.5
CHA6: IC5.42 SV7.6
CHA7: J18.4 SV9.5
CHA8: J17.4 SV9.6
CHA9: IC9.8 SV12.5
CHA10: IC9.42 SV12.6
CHA13: SV16.5
CHA14: SV16.6
CHB1: IC1.9 SV1.7
CHB2: IC1.41 SV1.8
CHB3: J9.3 SV4.7
CHB4: J8.3 SV4.8
CHB5: IC5.9 SV7.7
CHB6: IC5.41 SV7.8
CHB7: J18.3 SV9.7
CHB8: J17.3 SV9.8
CHB9: IC9.9 SV12.7
CHB10: IC9.41 SV12.8
CHB13: SV16.7
CHB14: SV16.8
EN1: IC1.13 SV1.13
EN2: IC1.12 SV1.14
EN3: SV4.13 U5.4
EN4: SV4.14 U6.4
EN5: IC5.13 SV7.13
EN6: IC5.12 SV7.14
EN7: SV9.13 U13.4
EN8: SV9.14 U14.4
EN9: IC9.13 SV12.13
EN10: IC9.12 SV12.14
EN13: SV16.13
EN14: SV16.14
GAIN_A1: J4.2 U3.4
GAIN_A2: J15.2 U11.4
GAIN_A3: J24.2 U19.4
GAIN_ANA1: J13.2 U9.4
GAIN_ANA2: J2.2 U1.4
GAIN_ANA3: J22.2 U17.4
GAIN_ANB1: J14.2 U10.4
GAIN_ANB2: J3.2 U2.4
GAIN_ANB3: J23.2 U18.4
GAIN_B1: J5.2 U4.4
GAIN_B2: J16.2 U12.4
GAIN_B3: J25.2 U20.4
GND: C1.2 C2.1 C3.2 C4.2 C5.1 C6.2 C7.1 C8.2 C9.2 C10.2 C11.2 C12.2 C13.2 C16.2 C17.2 C18.2 C19.2 H1.B2,8 H2.B2,8 H3.B2,8 H4.B2,8 IC1.6 IC1.16 IC1.29 IC1.39 IC2.1 IC2.2 IC2.3 IC2.4 IC2.7 IC3.2 IC4.4 IC4.PAD ICSP.3 J2.3 J3.3 J4.3 J5.3 J6.3 J7.3 JP1.1 LED1.C LED2.C LED3.C LED4.C LP.C R10.2 R12.1 R14.1 SV1.15 SV1.16 SV2.4 SV2.9 SV2.10 SV2.19 U1.2 U2.2 U3.2 U4.2 VR1.2 VR1.4 VR2.2 VR2.4 XT1.2 XT1.4
GND1: C20.1 C21.1 C22.1 C23.1 C24.- C25.2 C26.2 C27.2 C28.2 H5.B2,8 H6.B2,8 H7.B2,8 H8.B2,8 J8.1 J9.1 JP2.1 JP3.3 JP4.3 JP5.3 L4.C L5.C L6.C L7.C PS3.1 R22.1 R24.1 SV3.4 SV3.9 SV3.10 SV3.19 SV4.15 SV4.16 SV5.1 SV5.2 U5.1 U5.7 U5.PAD U6.1 U6.7 U6.PAD U7.5 U8.5
GND2: C29.2 C30.2 C31.2 C32.1 C33.2 C34.1 C35.1 C36.2 C37.2 C38.2 C39.2 C40.2 C43.2 C44.2 C45.2 C46.2 C47.2 H9.B2,8 H10.B2,8 H11.B2,8 H12.B2,8 IC5.6 IC5.16 IC5.29 IC5.39 IC6.1 IC6.2 IC6.3 IC6.4 IC6.7 IC7.2 IC8.4 IC8.PAD ICSP1.3 J11.3 J12.3 J13.3 J14.3 J15.3 J16.3 JP6.1 LED5.C LED6.C LED7.C LED8.C LP1.C R34.2 R36.1 R38.1 SV6.4 SV6.9 SV6.10 SV6.19 SV7.15 SV7.16 U9.2 U10.2 U11.2 U12.2 VR3.2 VR3.4 VR4.2 VR4.4 XT2.2 XT2.4
GND3: C48.1 C49.1 C50.1 C51.1 C52.- C53.2 C54.2 C55.2 C56.2 H13.B2,8 H14.B2,8 H15.B2,8 H16.B2,8 J17.1 J18.1 JP7.1 JP8.3 JP9.3 JP10.3 L11.C L12.C L13.C L14.C PS6.1 R46.1 R48.1 SV8.4 SV8.9 SV8.10 SV8.19 SV9.15 SV9.16 SV10.1 SV10.2 U13.1 U13.7 U13.PAD U14.1 U14.7 U14.PAD U15.5 U16.5
GND4: C57.2 C58.2 C59.2 C60.1 C61.2 C62.1 C63.1 C64.2 C65.2 C66.2 C67.2 C68.2 C71.2 C72.2 C73.2 C74.2 C75.2 H17.B2,8 H18.B2,8 H19.B2,8 H20.B2,8 IC9.6 IC9.16 IC9.29 IC9.39 IC10.1 IC10.2 IC10.3 IC10.4 IC10.7 IC11.2 IC12.4 IC12.PAD ICSP2.3 J20.3 J21.3 J22.3 J23.3 J24.3 J25.3 JP11.1 LED9.C LED10.C LED11.C LED12.C LP2.C R58.2 R60.1 R62.1 SV11.4 SV11.9 SV11.10 SV11.19 SV12.15 SV12.16 U17.2 U18.2 U19.2 U20.2 VR5.2 VR5.4 VR6.2 VR6.4 XT3.2 XT3.4
GND6: H25.B2,8 H26.B2,8 H27.B2,8 H28.B2,8 SV15.4 SV15.9 SV15.10 SV15.19 SV16.15 SV16.16
IN_A1: SV1.17 U3.3
IN_A2: SV7.17 U11.3
IN_A3: SV12.17 U19.3
IN_A5: SV16.17
IN_B1: SV1.19 U4.3
IN_B2: SV7.19 U12.3
IN_B3: SV12.19 U20.3
IN_B5: SV16.19
IO0: IC1.35 SV2.12
IO1: IC1.25 SV2.14
IO2: IC1.26 SV2.16
IO3: IC1.27 J4.4 SV2.18
IO4: IC1.36 J5.4 SV2.20
IO5: IC1.34 J3.4 SV2.17
IO6: IC1.33 J2.4 SV2.15
IO7: IC1.43 J6.1
IO8: IC1.32 J7.1
IO9: J9.2 SV4.1
IO10: J8.2 SV4.2
IO11: SV3.20
IO12: SV3.18
IO13: SV3.16
IO14: SV3.14
IO15: SV3.17
IO16: SV3.15
IO17: SV3.12
IO18: IC5.32 J12.1
IO19: IC5.43 J11.1
IO20: IC5.36 J16.4 SV6.20
IO21: IC5.27 J15.4 SV6.18
IO22: IC5.26 SV6.16
IO23: IC5.25 SV6.14
IO24: IC5.34 J14.4 SV6.17
IO25: IC5.33 J13.4 SV6.15
IO26: IC5.35 SV6.12
IO27: J18.2 SV9.1
IO28: J17.2 SV9.2
IO29: SV8.20
IO30: SV8.18
IO31: SV8.16
IO32: SV8.14
IO33: SV8.17
IO34: SV8.15
IO35: SV8.12
IO36: IC9.32 J21.1
IO37: IC9.43 J20.1
IO38: IC9.36 J25.4 SV11.20
IO39: IC9.27 J24.4 SV11.18
IO40: IC9.26 SV11.16
IO41: IC9.25 SV11.14
IO42: IC9.34 J23.4 SV11.17
IO43: IC9.33 J22.4 SV11.15
IO44: IC9.35 SV11.12
IO54: SV15.20
IO55: SV15.18
IO56: SV15.16
IO57: SV15.14
IO58: SV15.17
IO59: SV15.15
IO60: SV15.12
IO61: SV16.1
IO62: SV16.2
LD1: IC1.2 R4.1
LD2: IC1.3 R5.1
LD3: IC1.4 R6.1
LD4: IC1.5 R8.1
LD5: IC5.3 R30.1
LD6: IC5.2 R29.1
LD7: IC5.5 R32.1
LD8: IC5.4 R31.1
LD9: IC9.3 R54.1
LD10: IC9.2 R53.1
LD11: IC9.5 R56.1
LD12: IC9.4 R55.1
MCLR: IC1.18 ICSP.1 R1.1
MCLR1: IC5.18 ICSP1.1 R26.1
MCLR2: IC9.18 ICSP2.1 R50.1
N$1: IC3.3 L3.1
N$2: C7.2 IC1.30 XT1.1
N$3: C6.1 IC1.31 XT1.3
N$4: C14.1 IC4.1
N$5: LP.A R2.1
N$6: IC4.7 R9.1
N$7: IC3.5 R13.1 R14.2
N$8: C12.1 IC4.8
N$9: IC4.5 R10.1 R11.1
N$10: J6.2 SV1.2
N$11: L4.A R17.2
N$12: LED1.A R4.2
N$13: LED2.A R5.2
N$14: L5.A R18.2
N$15: C14.2 IC4.3 L2.1
N$16: C15.1 IC4.6
N$17: C15.2 R12.2
N$18: U5.8 U7.3 U7.4
N$19: U6.8 U8.3 U8.4
N$20: PS1.2 R18.1 U7.1 U7.2
N$21: R15.2 U1.1
N$22: R16.2 U2.1
N$23: J7.2 SV1.1
N$24: PS2.2 R20.1 U8.1 U8.2
N$25: PS1.1 R17.1 U5.6
N$26: PS2.1 R19.1 U6.6
N$27: C25.1 U7.6
N$28: C26.1 U8.6
N$29: R21.2 U7.7
N$30: R23.2 U8.7
N$31: D1.A PS3.2
N$32: C32.2 IC5.30 XT2.1
N$33: C31.1 IC5.31 XT2.3
N$34: LED5.A R29.2
N$35: LED6.A R30.2
N$36: LP1.A R25.1
N$37: IC8.7 R33.1
N$38: C39.1 IC8.8
N$39: IC8.5 R34.1 R35.1
N$40: C41.2 IC8.3 L9.1
N$41: C42.1 IC8.6
N$42: C42.2 R36.2
N$43: C41.1 IC8.1
N$44: IC7.3 L10.1
N$45: IC7.5 R37.1 R38.2
N$46: R39.2 U9.1
N$47: R40.2 U10.1
N$48: J11.2 SV7.2
N$49: J12.2 SV7.1
N$50: L11.A R41.2
N$51: L12.A R42.2
N$52: U13.8 U15.3 U15.4
N$53: U14.8 U16.3 U16.4
N$54: PS4.2 R42.1 U15.1 U15.2
N$55: PS5.2 R44.1 U16.1 U16.2
N$56: PS4.1 R41.1 U13.6
N$57: PS5.1 R43.1 U14.6
N$58: C53.1 U15.6
N$59: C54.1 U16.6
N$60: R45.2 U15.7
N$61: R47.2 U16.7
N$62: D2.A PS6.2
N$63: C60.2 IC9.30 XT3.1
N$64: C59.1 IC9.31 XT3.3
N$65: LED9.A R53.2
N$66: LED10.A R54.2
N$67: LP2.A R49.1
N$68: IC12.7 R57.1
N$69: C67.1 IC12.8
N$70: IC12.5 R58.1 R59.1
N$71: C69.2 IC12.3 L16.1
N$72: C70.1 IC12.6
N$73: C70.2 R60.2
N$74: C69.1 IC12.1
N$75: IC11.3 L17.1
N$76: IC11.5 R61.1 R62.2
N$77: R63.2 U17.1
N$78: R64.2 U18.1
N$79: J20.2 SV12.2
N$80: J21.2 SV12.1
PWMA1: IC1.14 SV1.9
PWMA2: IC1.10 SV1.10
PWMA3: SV4.9 U5.2
PWMA4: SV4.10 U6.2
PWMA5: IC5.14 SV7.9
PWMA6: IC5.10 SV7.10
PWMA7: SV9.9 U13.2
PWMA8: SV9.10 U14.2
PWMA9: IC9.14 SV12.9
PWMA10: IC9.10 SV12.10
PWMA13: SV16.9
PWMA14: SV16.10
PWMB1: IC1.15 SV1.11
PWMB2: IC1.11 SV1.12
PWMB3: SV4.11 U5.3
PWMB4: SV4.12 U6.3
PWMB5: IC5.15 SV7.11
PWMB6: IC5.11 SV7.12
PWMB7: SV9.11 U13.3
PWMB8: SV9.12 U14.3
PWMB9: IC9.15 SV12.11
PWMB10: IC9.11 SV12.12
PWMB13: SV16.11
PWMB14: SV16.12
RX1: IC1.38 SV2.7
RX2: IC1.24 SV2.11
RX3: JP4.2 SV3.11
RX4: JP3.2 SV3.7
RX5: IC5.24 SV6.11
RX6: IC5.38 SV6.7
RX7: JP9.2 SV8.11
RX8: JP8.2 SV8.7
RX9: IC9.24 SV11.11
RX10: IC9.38 SV11.7
RX13: SV15.11
RX14: SV15.7
SCL: IC1.44 IC2.6 R3.2 SV2.8
SCL1: JP5.1 SV3.8
SCL2: IC5.44 IC6.6 R28.2 SV6.8
SCL3: JP10.1 SV8.8
SCL4: IC9.44 IC10.6 R52.2 SV11.8
SCL6: SV15.8
SDA: IC1.1 IC2.5 R7.2 SV2.6
SDA1: JP5.2 SV3.6
SDA2: IC5.1 IC6.5 R27.2 SV6.6
SDA3: JP10.2 SV8.6
SDA4: IC9.1 IC10.5 R51.2 SV11.6
SDA6: SV15.6
TX1: IC1.37 SV2.5
TX2: IC1.23 SV2.13
TX3: JP3.1 SV3.5
TX4: JP4.1 SV3.13
TX5: IC5.37 SV6.5
TX6: IC5.23 SV6.13
TX7: JP8.1 SV8.5
TX8: JP9.1 SV8.13
TX9: IC9.37 SV11.5
TX10: IC9.23 SV11.13
TX13: SV15.5
TX14: SV15.13
VCAP/VDDCORE: C1.1 IC1.7
VCAP/VDDCORE1: C33.1 IC5.7
VCAP/VDDCORE2: C61.1 IC9.7
VENC: J1.2 SV1.3 SV1.4
VENC1: J8.5 J9.5 SV4.3 SV4.4
VENC1-LD1: L6.A R19.2
VENC1-LD2: LED7.A R31.2
VENC1-LD3: LED3.A R6.2
VENC1-LD4: L13.A R43.2
VENC1-LD5: LED11.A R55.2
VENC2: J10.2 SV7.3 SV7.4
VENC2-LD1: L7.A R20.2
VENC2-LD2: LED8.A R32.2
VENC2-LD3: L14.A R44.2
VENC2-LD4: LED4.A R8.2
VENC2-LD5: LED12.A R56.2
VENC3: J17.5 J18.5 SV9.3 SV9.4
VENC4: J19.2 SV12.3 SV12.4

## Tracks (layer width: path | path; a pad name or v marks a point on that pad's centre or on a via)
+3V2  (via drill 0.3, 0.41)
  Top 0.254: R27.1 62.52,87.15 | U10.5 57.85,54.85 57.91,54.89 | 59.82,54.89 C44.1
  Top 0.305: C46.1 59.85,58.62 58.93,58.62 | 58.93,58.62 U9.5 | 58.93,54.89 58.93,58.62
  Top 0.406: IC5.40 63.97,78.8 63.54,79.23 C35.2 | IC5.28 74.55,71.65 74.76,71.44 C36.1 76.87,71.44 v77.47,72.03 | C35.2 61.09,80.16 IC6.8 | R27.1 62.36,87.15 62.52,87.15 64.01,87.15 R28.1 | v63.63,81.69 63.63,80.16 C35.2 | L10.2 67.93,85.12 C30.1 | U10.5 58.24,54.94 58.55,54.64 v58.55,54 | U12.5 57.79,62.31 57.79,63.14 | 57.79,63.14 v57.15,63.14 | U9.5 58.17,58.62 v58.17,57.68 58.17,57.61 | 53.34,69.37 53.98,69.37 55.96,67.39 U11.5 56.9,67.39 v56.9,66.45 57.79,65.56 57.79,64.41 | R26.2 66.33,61.28 66.04,60.99 63.5,60.99 v63.5,60.73 63.49,61.1 63.49,61.99 L8.2 | v61.6,60.73 61.6,62.26 59.22,62.26 C45.1 59.18,63.14 v60.2,63.14 57.79,63.14 | C47.1 57.79,64.41 | 57.79,64.41 57.79,63.14 | C37.1 53.34,69.37 | v54.48,82.58 54.48,79.78 54.23,79.53 46.48,79.53 46.36,79.4 J10.1 46.36,78.77 45.85,78.26 45.85,73.3 47.12,72.03 47.12,69.37 | 53.34,69.37 47.12,69.37 | 47.12,69.37 ICSP1.2 | 59.82,54.89 58.93,54.89 57.91,54.89
  Top 0.508: TP3.TP 65.53,87.15 64.01,87.15 | 67.95,85.12 v66.68,85.12 | v77.47,72.03 v77.47,82.07
  Top 0.61: TP3.TP v66.68,85.12 C30.1 | R37.2 68.07,82.28 68.07,83.46 67.98,83.55 C29.1 67.93,83.64 67.93,85.12 | L10.2 67.93,85.13 67.95,85.12
  Bottom 0.406: SV6.3 80.14,82.07 v77.47,82.07 | v56.9,66.45 J15.1 | v63.5,60.73 63.5,61.11 63.25,61.37 61.98,61.37 61.6,60.99 v61.6,60.73 | J16.1 57.2,62.89 v57.15,63.14 | J13.1 v58.17,57.68 58.17,59.72 58.8,60.35 58.8,63.14 v60.2,63.14 | J14.1 v58.55,54
  Bottom 0.508: 66.68,82.45 v66.68,85.12 66.68,86.51 67.69,87.53 67.69,88.29 68.2,88.8 71.76,88.8 73.03,87.53 76.71,87.53 76.71,82.83 v77.47,82.07 | 66.68,82.45 66.68,81.81 66.55,81.69 v63.63,81.69 62.99,81.69 62.23,82.45 54.61,82.45 v54.48,82.58 | VR3.3 67.84,82.45 66.68,82.45
+3V3  (via drill 0.3, 0.41)
  Top 0.254: R7.1 62.52,42.19 | U2.5 57.85,9.89 57.91,9.93 | 59.82,9.93 C16.1
  Top 0.305: C18.1 59.85,13.67 58.93,13.67 | 58.93,13.67 U1.5 | 58.93,9.93 58.93,13.67
  Top 0.406: IC1.40 63.97,33.85 63.54,34.28 C5.2 | IC1.28 74.55,26.7 74.76,26.48 C3.1 76.87,26.48 v77.47,27.08 | C5.2 61.09,35.2 IC2.8 | R7.1 62.36,42.19 62.52,42.19 64.01,42.19 R3.1 | v63.63,36.73 63.63,35.2 C5.2 | L3.2 67.93,40.16 C8.1 | U2.5 58.24,9.98 58.55,9.68 v58.55,9.04 | U4.5 57.79,17.35 57.79,18.19 | 57.79,18.19 v57.15,18.19 | U1.5 58.17,13.67 v58.17,12.73 58.17,12.65 | 53.34,24.41 53.98,24.41 55.96,22.43 U3.5 56.9,22.43 v56.9,21.49 57.79,20.6 57.79,19.46 | R1.2 66.33,16.32 66.04,16.03 63.5,16.03 v63.5,15.77 63.49,16.14 L1.2 | v61.6,15.77 61.6,17.3 59.22,17.3 C17.1 59.18,18.19 v60.2,18.19 57.79,18.19 | C19.1 57.79,19.46 | 57.79,19.46 57.79,18.19 | C10.1 53.34,24.41 | v54.48,37.62 54.48,34.82 54.23,34.57 46.48,34.57 46.36,34.44 J1.1 46.36,33.81 45.85,33.3 45.85,28.35 47.12,27.08 47.12,24.41 | 53.34,24.41 47.12,24.41 | 47.12,24.41 ICSP.2 | 59.82,9.93 58.93,9.93 57.91,9.93
  Top 0.508: TP1.TP 65.53,42.19 64.01,42.19 | 67.95,40.16 v66.68,40.16 | v77.47,27.08 v77.47,37.11
  Top 0.61: TP1.TP v66.68,40.16 C8.1 | R13.2 68.07,37.32 68.07,38.51 67.98,38.59 C9.1 67.93,38.68 67.93,40.16 | L3.2 67.93,40.17 67.95,40.16
  Bottom 0.406: SV2.3 80.14,37.11 v77.47,37.11 | v56.9,21.49 J4.1 | v63.5,15.77 63.5,16.15 63.25,16.41 61.98,16.41 61.6,16.03 v61.6,15.77 | J5.1 57.2,17.93 v57.15,18.19 | J2.1 v58.17,12.73 58.17,14.76 58.8,15.39 58.8,18.19 v60.2,18.19 | J3.1 v58.55,9.04
  Bottom 0.508: 66.68,37.49 v66.68,40.16 66.68,41.55 67.69,42.57 67.69,43.33 68.2,43.84 71.76,43.84 73.03,42.57 76.71,42.57 76.71,37.87 v77.47,37.11 | 66.68,37.49 66.68,36.86 66.55,36.73 v63.63,36.73 62.99,36.73 62.23,37.49 54.61,37.49 v54.48,37.62 | VR1.3 67.84,37.49 66.68,37.49
+3V5  (via drill 0.3, 0.41)
  Top 0.254: R51.1 107.48,42.19 | U18.5 102.81,9.89 102.87,9.93 | 104.78,9.93 C72.1
  Top 0.305: C74.1 104.81,13.67 103.89,13.67 | 103.89,13.67 U17.5 | 103.89,9.93 103.89,13.67
  Top 0.406: IC9.40 108.93,33.85 108.5,34.28 C63.2 | IC9.28 119.51,26.7 119.72,26.48 C64.1 121.83,26.48 v122.43,27.08 | C63.2 106.05,35.2 IC10.8 | R51.1 107.32,42.19 107.48,42.19 108.97,42.19 R52.1 | v108.59,36.73 108.59,35.2 C63.2 | L17.2 112.89,40.16 C58.1 | U18.5 103.2,9.98 103.51,9.68 v103.51,9.04 | U20.5 102.74,17.35 102.74,18.19 | 102.74,18.19 v102.11,18.19 | U17.5 103.12,13.67 v103.12,12.73 103.12,12.65 | 98.3,24.41 98.93,24.41 100.91,22.43 U19.5 101.85,22.43 v101.85,21.49 102.74,20.6 102.74,19.46 | R50.2 111.29,16.32 111,16.03 108.46,16.03 v108.46,15.77 108.45,16.14 L15.2 | v106.55,15.77 106.55,17.3 104.18,17.3 C73.1 104.14,18.19 v105.16,18.19 102.74,18.19 | C75.1 102.74,19.46 | 102.74,19.46 102.74,18.19 | C65.1 98.3,24.41 | v99.44,37.62 99.44,34.82 99.19,34.57 91.44,34.57 91.31,34.44 J19.1 91.31,33.81 90.81,33.3 90.81,28.35 92.08,27.08 92.08,24.41 | 98.3,24.41 92.08,24.41 | 92.08,24.41 ICSP2.2 | 104.78,9.93 103.89,9.93 102.87,9.93
  Top 0.508: TP5.TP 110.49,42.19 108.97,42.19 | 112.9,40.16 v111.63,40.16 | v122.43,27.08 v122.43,37.11
  Top 0.61: TP5.TP v111.63,40.16 C58.1 | R61.2 113.03,37.32 113.03,38.51 112.94,38.59 C57.1 112.89,38.68 112.89,40.16 | L17.2 112.89,40.17 112.9,40.16
  Bottom 0.406: SV11.3 125.1,37.11 v122.43,37.11 | v101.85,21.49 J24.1 | v108.46,15.77 108.46,16.15 108.2,16.41 106.93,16.41 106.55,16.03 v106.55,15.77 | J25.1 102.16,17.93 v102.11,18.19 | J22.1 v103.12,12.73 103.12,14.76 103.76,15.39 103.76,18.19 v105.16,18.19 | J23.1 v103.51,9.04
  Bottom 0.508: 111.63,37.49 v111.63,40.16 111.63,41.55 112.65,42.57 112.65,43.33 113.16,43.84 116.71,43.84 117.98,42.57 121.67,42.57 121.67,37.87 v122.43,37.11 | 111.63,37.49 111.63,36.86 111.51,36.73 v108.59,36.73 107.95,36.73 107.19,37.49 99.57,37.49 v99.44,37.62 | VR5.3 112.8,37.49 111.63,37.49
+5V  (via drill 0.3, 0.41, 0.61)
  Top 0.406: IC3.4 71.2,37.27 C4.1 | 77.72,19.33 82.3,19.33 | J1.3 47.37,37.36 47.63,37.11 52.83,37.11 v53.59,36.35
  Top 0.508: J1.3 46.36,38.89 47.37,39.9 52.32,39.9 R2.2 | L2.2 64.52,11.33 v64.52,9.68 | v64.52,9.68 v62.36,9.68 | R11.2 65.44,8.11 64.77,8.79 64.77,9.42 v64.52,9.68
  Top 0.61: 76.45,38.38 SV2.2 78.87,39.78 82.93,39.78 83.06,39.65 83.57,39.65 84.2,39.01 84.2,20.47 83.06,19.33 82.3,19.33 | TP2.TP v62.36,9.68 C13.1 62.36,11.33 | 76.45,38.38 76.45,40.54 75.57,40.54 74.68,41.43 73.11,41.43 IC3.1 | 76.45,38.38 76.45,37.87 75.95,37.36 v75.95,35.46 | C4.1 71.12,36.73 v71.12,35.2 71.12,36.6 71.2,36.68 IC3.4 | L2.2 64.44,14.25 v64.39,14.38 | v73.91,19.96 77.09,19.96 77.72,19.33
  Bottom 0.508: v71.12,35.2 73.03,35.2 73.28,35.46 v75.95,35.46 | VR2.3 64.52,11.51 v64.52,9.68
  Bottom 0.61: v53.59,36.35 53.85,36.6 61.6,36.6 62.61,35.59 65.66,35.59 65.91,35.84 67.56,35.84 68.2,35.2 v71.12,35.2 71.12,37.52 VR1.1 | v64.39,14.38 64.52,14.5 64.52,15.77 65.15,16.41 69.47,16.41 73.03,19.96 v73.91,19.96
+5V1  (via drill 0.3, 0.41)
  Top 0.508: 12.83,20.6 v13.02,20.79 U8.8 | U7.8 23.75,21.87 22.61,20.73 v18.92,20.73
  Top 0.61: v26.54,21.87 U7.8
  Bottom 0.508: v18.92,20.73 13.09,20.73 v13.02,20.79
  Bottom 0.61: SV3.2 32.26,38.38 32.26,22.89 31.24,21.87 v26.54,21.87 | SV5.6 SV5.5 11.68,15.52 12.95,16.79 12.95,20.73 v13.02,20.79
+5V2  (via drill 0.3, 0.41, 0.61)
  Top 0.406: IC7.4 71.2,82.23 C43.1 | 77.72,64.29 82.3,64.29 | J10.3 47.37,82.32 47.63,82.07 52.83,82.07 v53.59,81.31
  Top 0.508: J10.3 46.36,83.85 47.37,84.86 52.32,84.86 R25.2 | L9.2 64.52,56.29 v64.52,54.64 | v64.52,54.64 v62.36,54.64 | R35.2 65.44,53.07 64.77,53.75 64.77,54.38 v64.52,54.64
  Top 0.61: 76.45,83.34 SV6.2 78.87,84.73 82.93,84.73 83.06,84.61 83.57,84.61 84.2,83.97 84.2,65.43 83.06,64.29 82.3,64.29 | TP4.TP v62.36,54.64 C40.1 62.36,56.29 | 76.45,83.34 76.45,85.5 75.57,85.5 74.68,86.39 73.11,86.39 IC7.1 | 76.45,83.34 76.45,82.83 75.95,82.32 v75.95,80.42 | C43.1 71.12,81.69 v71.12,80.16 71.12,81.56 71.2,81.64 IC7.4 | L9.2 64.44,59.21 v64.39,59.33 | v73.91,64.92 77.09,64.92 77.72,64.29
  Bottom 0.508: v71.12,80.16 73.03,80.16 73.28,80.42 v75.95,80.42 | VR4.3 64.52,56.46 v64.52,54.64
  Bottom 0.61: v53.59,81.31 53.85,81.56 61.6,81.56 62.61,80.54 65.66,80.54 65.91,80.8 67.56,80.8 68.2,80.16 v71.12,80.16 71.12,82.48 VR3.1 | v64.39,59.33 64.52,59.46 64.52,60.73 65.15,61.37 69.47,61.37 73.03,64.92 v73.91,64.92
+5V3  (via drill 0.3, 0.41)
  Top 0.508: 12.83,65.56 v13.02,65.75 U16.8 | U15.8 23.75,66.83 22.61,65.68 v18.92,65.68
  Top 0.61: v26.54,66.83 U15.8
  Bottom 0.508: v18.92,65.68 13.09,65.68 v13.02,65.75
  Bottom 0.61: SV8.2 32.26,83.34 32.26,67.84 31.24,66.83 v26.54,66.83 | SV10.6 SV10.5 11.68,60.48 12.95,61.75 12.95,65.68 v13.02,65.75
+5V4  (via drill 0.3, 0.41, 0.61)
  Top 0.406: IC11.4 116.15,37.27 C71.1 | 122.68,19.33 127.25,19.33 | J19.3 92.33,37.36 92.58,37.11 97.79,37.11 v98.55,36.35
  Top 0.508: J19.3 91.31,38.89 92.33,39.9 97.28,39.9 R49.2 | L16.2 109.47,11.33 v109.47,9.68 | v109.47,9.68 v107.32,9.68 | R59.2 110.4,8.11 109.73,8.79 109.73,9.42 v109.47,9.68
  Top 0.61: 121.41,38.38 SV11.2 123.83,39.78 127.89,39.78 128.02,39.65 128.52,39.65 129.16,39.01 129.16,20.47 128.02,19.33 127.25,19.33 | TP6.TP v107.32,9.68 C68.1 107.32,11.33 | 121.41,38.38 121.41,40.54 120.52,40.54 119.63,41.43 118.07,41.43 IC11.1 | 121.41,38.38 121.41,37.87 120.9,37.36 v120.9,35.46 | C71.1 116.08,36.73 v116.08,35.2 116.08,36.6 116.15,36.68 IC11.4 | L16.2 109.4,14.25 v109.35,14.38 | v118.87,19.96 122.05,19.96 122.68,19.33
  Bottom 0.508: v116.08,35.2 117.98,35.2 118.24,35.46 v120.9,35.46 | VR6.3 109.47,11.51 v109.47,9.68
  Bottom 0.61: v98.55,36.35 98.81,36.6 106.55,36.6 107.57,35.59 110.62,35.59 110.87,35.84 112.52,35.84 113.16,35.2 v116.08,35.2 116.08,37.52 VR5.1 | v109.35,14.38 109.47,14.5 109.47,15.77 110.11,16.41 114.43,16.41 117.98,19.96 v118.87,19.96
+12V  (via drill 0.41)
  Top 0.61: IC4.2 v68.2,13.74 | v71.12,16.54 69.72,16.54 69.34,16.92 C11.1 | SV2.1 82.93,38.38 83.31,38 83.31,24.41 v83.06,24.16 | R9.2 79.76,13.49 v80.26,14
  Bottom 0.61: JP1.2 77.22,8.66 77.72,9.17 77.72,14 | v83.06,24.16 83.06,14.38 82.68,14 v80.26,14 77.72,14 | VR2.1 67.87,11.71 68.2,11.71 v68.2,13.74 68.2,15.39 69.98,15.39 v71.12,16.54 71.88,17.3 75.82,17.3 77.22,15.77 77.22,15.01 77.72,14.5 77.72,14
+12V1  (via drill 0.41, 0.81)
  Top 0.61: JP2.2 32,9.42 32.64,10.06 32.64,13.63 D1.C | 13.74,29.51 C22.2 | 15.87,29.61 U6.5 | 25.42,29.51 C23.2 | 27.56,29.61 U5.5 | 22.97,29.49 C20.2
  Top 1.016: D1.C 30.86,16.79 30.48,17.17 C24.+ v30.73,17.17 | 13.74,29.51 C21.2 11.29,29.49 10.8,29.49 v10.8,28.35 | C22.2 15.87,29.61 | C20.2 25.42,29.51 | C23.2 27.56,29.61 | v22.73,28.22 22.73,29.36 22.86,29.49 22.97,29.49
  Bottom 0.813: SV3.1 36.45,38.51 34.8,40.16 30.99,40.16 29.21,38.38 24.77,38.38 24.13,37.74 22.73,37.74 v22.73,28.22
  Bottom 1.016: v10.8,28.35 16.26,28.35 17.53,27.08 22.73,27.08 | 22.73,27.08 v22.73,28.22 | v30.73,17.17 23.88,17.17 23.88,26.44 23.24,27.08 22.73,27.08
+12V2  (via drill 0.41)
  Top 0.61: IC8.2 v68.2,58.7 | v71.12,61.49 69.72,61.49 69.34,61.88 C38.1 | SV6.1 82.93,83.34 83.31,82.96 83.31,69.37 v83.06,69.11 | R33.2 79.76,58.45 v80.26,58.95
  Bottom 0.61: JP6.2 77.22,53.62 77.72,54.13 77.72,58.95 | v83.06,69.11 83.06,59.33 82.68,58.95 v80.26,58.95 77.72,58.95 | VR4.1 67.87,56.67 68.2,56.67 v68.2,58.7 68.2,60.35 69.98,60.35 v71.12,61.49 71.88,62.26 75.82,62.26 77.22,60.73 77.22,59.97 77.72,59.46 77.72,58.95
+12V3  (via drill 0.41, 0.81)
  Top 0.61: JP7.2 32,54.38 32.64,55.02 32.64,58.59 D2.C | 13.74,74.46 C50.2 | 15.87,74.57 U14.5 | 25.42,74.46 C51.2 | 27.56,74.57 U13.5 | 22.97,74.45 C48.2
  Top 1.016: D2.C 30.86,61.75 30.48,62.13 C52.+ v30.73,62.13 | 13.74,74.46 C49.2 11.29,74.45 10.8,74.45 v10.8,73.3 | C50.2 15.87,74.57 | C48.2 25.42,74.46 | C51.2 27.56,74.57 | v22.73,73.18 22.73,74.32 22.86,74.45 22.97,74.45
  Bottom 0.813: SV8.1 36.45,83.46 34.8,85.12 30.99,85.12 29.21,83.34 24.77,83.34 24.13,82.7 22.73,82.7 v22.73,73.18
  Bottom 1.016: v10.8,73.3 16.26,73.3 17.53,72.03 22.73,72.03 | 22.73,72.03 v22.73,73.18 | v30.73,62.13 23.88,62.13 23.88,71.4 23.24,72.03 22.73,72.03
+12V4  (via drill 0.41)
  Top 0.61: IC12.2 v113.16,13.74 | v116.08,16.54 114.68,16.54 114.3,16.92 C66.1 | SV11.1 127.89,38.38 128.27,38 128.27,24.41 v128.02,24.16 | R57.2 124.71,13.49 v125.22,14
  Bottom 0.61: JP11.2 122.17,8.66 122.68,9.17 122.68,14 | v128.02,24.16 128.02,14.38 127.64,14 v125.22,14 122.68,14 | VR6.1 112.83,11.71 113.16,11.71 v113.16,13.74 113.16,15.39 114.94,15.39 v116.08,16.54 116.84,17.3 120.78,17.3 122.17,15.77 122.17,15.01 122.68,14.5 122.68,14
ANA1  (via drill 0.3)
  Top 0.254: IC1.19 66.37,22.25 v66.55,22.25 | U3.1 54.41,22.43 v54.61,22.63
  Bottom 0.254: v54.61,22.63 58.55,22.63 60.2,20.98 65.53,20.98 66.55,22 v66.55,22.25
ANA2  (via drill 0.3)
  Top 0.254: SV1.18 48.9,18.06 v49.91,17.04 | v55.12,10.82 55.12,11.71 54.94,11.71 | U1.3 54.94,11.71 | 54.94,11.71 54.86,11.71
  Bottom 0.254: v49.91,17.04 49.66,16.79 49.66,14.88 50.55,14 51.69,14 52.07,13.61 52.07,12.22 52.83,11.46 54.48,11.46 v55.12,10.82
ANA2/PGD  (via drill 0.3)
  Top 0.254: IC1.21 v67.97,19.48 | R15.1 53,15.48 52.96,15.52 52.71,15.52 52.45,15.77 v52.45,16.79
  Bottom 0.254: v52.45,16.79 52.45,17.42 | ICSP.4 47.37,19.33 51.82,19.33 52.45,18.69 52.45,17.42 | v67.97,19.48 67.95,19.46 56.64,19.46 54.61,17.42 52.45,17.42
ANA2/PGD1  (via drill 0.3)
  Top 0.254: IC5.21 v67.97,64.44 | R39.1 53,60.44 52.96,60.48 52.71,60.48 52.45,60.73 v52.45,61.75
  Bottom 0.254: v52.45,61.75 52.45,62.38 | ICSP1.4 47.37,64.29 51.82,64.29 52.45,63.65 52.45,62.38 | v67.97,64.44 67.95,64.41 56.64,64.41 54.61,62.38 52.45,62.38
ANA2/PGD2  (via drill 0.3)
  Top 0.254: IC9.21 v112.93,19.48 | R63.1 97.96,15.48 97.92,15.52 97.66,15.52 97.41,15.77 v97.41,16.79
  Bottom 0.254: v97.41,16.79 97.41,17.42 | ICSP2.4 92.33,19.33 96.77,19.33 97.41,18.69 97.41,17.42 | v112.93,19.48 112.9,19.46 101.6,19.46 99.57,17.42 97.41,17.42
ANA3  (via drill 0.41)
  Top 0.254: R21.1 C27.1 R22.2 20.49,21.7 v20.57,21.62 | v14.86,21.62 14.86,20.22 13.97,19.33 7.24,19.33 SV4.17
  Bottom 0.254: v20.57,21.62 v14.86,21.62
ANA4
  Top 0.254: 3.56,18.06 SV4.18 1.78,18.06 1.52,18.31 1.52,21.49 1.91,21.87 8.38,21.87 8.8,22.29 R24.2 C28.1 R23.1
ANA5  (via drill 0.3)
  Top 0.254: IC5.19 66.37,67.21 v66.55,67.21 | U11.1 54.41,67.39 v54.61,67.59
  Bottom 0.254: v54.61,67.59 58.55,67.59 60.2,65.94 65.53,65.94 66.55,66.95 v66.55,67.21
ANA6  (via drill 0.3)
  Top 0.254: SV7.18 48.9,63.02 v49.91,62 | v55.12,55.78 55.12,56.67 54.94,56.67 | U9.3 54.94,56.67 | 54.94,56.67 54.86,56.67
  Bottom 0.254: v49.91,62 49.66,61.75 49.66,59.84 50.55,58.95 51.69,58.95 52.07,58.57 52.07,57.18 52.83,56.41 54.48,56.41 v55.12,55.78
ANA7  (via drill 0.41)
  Top 0.254: R45.1 C55.1 R46.2 20.49,66.66 v20.57,66.57 | v14.86,66.57 14.86,65.18 13.97,64.29 7.24,64.29 SV9.17
  Bottom 0.254: v20.57,66.57 v14.86,66.57
ANA8
  Top 0.254: 3.56,63.02 SV9.18 1.78,63.02 1.52,63.27 1.52,66.45 1.91,66.83 8.38,66.83 8.8,67.25 R48.2 C56.1 R47.1
ANA9  (via drill 0.3)
  Top 0.254: IC9.19 111.33,22.25 v111.51,22.25 | U19.1 99.37,22.43 v99.57,22.63
  Bottom 0.254: v99.57,22.63 103.51,22.63 105.16,20.98 110.49,20.98 111.51,22 v111.51,22.25
ANA10  (via drill 0.3)
  Top 0.254: SV12.18 93.85,18.06 v94.87,17.04 | v100.08,10.82 100.08,11.71 99.9,11.71 | U17.3 99.9,11.71 | 99.9,11.71 99.82,11.71
  Bottom 0.254: v94.87,17.04 94.62,16.79 94.62,14.88 95.5,14 96.65,14 97.03,13.61 97.03,12.22 97.79,11.46 99.44,11.46 v100.08,10.82
ANB1  (via drill 0.3)
  Top 0.254: IC1.20 67.17,21.73 67.69,22.25 v68.2,22.25 | U4.1 53.98,17.35 v53.98,18.31
  Bottom 0.254: v53.98,18.31 54.61,18.31 56.26,19.96 66.29,19.96 67.82,21.36 67.82,21.87 v68.2,22.25
ANB2
  Top 0.254: SV1.20 48.39,14.25 48.64,14 49.66,14 51.69,11.96 51.69,8.53 52.12,8.1 U2.3
ANB2/PGC  (via drill 0.3)
  Top 0.254: IC1.22 68.77,20.28 68.96,20.09 v70.61,20.09 | ICSP.5 47.37,16.79 49.15,16.79 49.66,16.28 49.66,14.76 50.42,14 51.44,14 51.56,13.87 51.56,13.11 52.07,12.6 v52.83,12.6 R16.1
  Bottom 0.254: v70.61,20.09 70.61,19.33 68.83,17.55 61.47,17.55 60.33,16.41 60.33,15.27 59.69,14.63 59.69,11.84 59.06,11.2 57.15,11.2 56.9,10.95 56.01,10.95 54.99,11.96 53.47,11.96 v52.83,12.6
ANB2/PGC1  (via drill 0.3)
  Top 0.254: IC5.22 68.77,65.24 68.96,65.05 v70.61,65.05 | ICSP1.5 47.37,61.75 49.15,61.75 49.66,61.24 49.66,59.72 50.42,58.95 51.44,58.95 51.56,58.83 51.56,58.06 52.07,57.56 v52.83,57.56 R40.1
  Bottom 0.254: v70.61,65.05 70.61,64.29 68.83,62.51 61.47,62.51 60.33,61.37 60.33,60.22 59.69,59.59 59.69,56.79 59.06,56.16 57.15,56.16 56.9,55.91 56.01,55.91 54.99,56.92 53.47,56.92 v52.83,57.56
ANB2/PGC2  (via drill 0.3)
  Top 0.254: IC9.22 113.73,20.28 113.92,20.09 v115.57,20.09 | ICSP2.5 92.33,16.79 94.11,16.79 94.62,16.28 94.62,14.76 95.38,14 96.39,14 96.52,13.87 96.52,13.11 97.03,12.6 v97.79,12.6 R64.1
  Bottom 0.254: v115.57,20.09 115.57,19.33 113.79,17.55 106.43,17.55 105.28,16.41 105.28,15.27 104.65,14.63 104.65,11.84 104.01,11.2 102.11,11.2 101.85,10.95 100.97,10.95 99.95,11.96 98.43,11.96 v97.79,12.6
ANB3
  Bottom 0.254: SV4.19 6.48,15.52 7.75,16.79 9.53,16.79 SV5.4
ANB4
  Bottom 0.254: SV5.3 6.99,16.79 4.7,16.79 SV4.20
ANB5  (via drill 0.3)
  Top 0.254: IC5.20 67.17,66.69 67.69,67.21 v68.2,67.21 | U12.1 53.98,62.31 v53.98,63.27
  Bottom 0.254: v53.98,63.27 54.61,63.27 56.26,64.92 66.29,64.92 67.82,66.32 67.82,66.83 v68.2,67.21
ANB6
  Top 0.254: SV7.20 48.39,59.21 48.64,58.95 49.66,58.95 51.69,56.92 51.69,53.49 52.12,53.06 U10.3
ANB7
  Bottom 0.254: SV9.19 6.48,60.48 7.75,61.75 9.53,61.75 SV10.4
ANB8
  Bottom 0.254: SV10.3 6.99,61.75 4.7,61.75 SV9.20
ANB9  (via drill 0.3)
  Top 0.254: IC9.20 112.13,21.73 112.65,22.25 v113.16,22.25 | U20.1 98.93,17.35 v98.93,18.31
  Bottom 0.254: v98.93,18.31 99.57,18.31 101.22,19.96 111.25,19.96 112.78,21.36 112.78,21.87 v113.16,22.25
ANB10
  Top 0.254: SV12.20 93.35,14.25 93.6,14 94.62,14 96.65,11.96 96.65,8.53 97.08,8.1 U18.3
AVDD
  Top 0.406: IC1.17 64.77,19.71 65.24,19.24 C2.2
  Top 0.61: L1.1 65.29,18.52 C2.2
AVDD1
  Top 0.406: IC5.17 64.77,64.67 65.24,64.2 C34.2
  Top 0.61: L8.1 65.29,63.48 C34.2
AVDD2
  Top 0.406: IC9.17 109.73,19.71 110.2,19.24 C62.2
  Top 0.61: L15.1 110.25,18.52 C62.2
CHA1  (via drill 0.3)
  Top 0.254: IC1.8 59.74,25.1 v60.83,26.19
  Bottom 0.254: v60.83,26.19 60.33,26.19 58.93,27.58 53.21,27.58 52.71,28.09 52.71,31.78 51.18,33.3 SV1.5
CHA2  (via drill 0.3)
  Top 0.254: IC1.42 62.37,31.28 62.23,31.14 60.33,31.14 59.44,32.03 v59.44,32.66
  Bottom 0.254: SV1.6 49.66,34.57 51.82,34.57 52.58,33.81 52.58,33.05 52.83,32.79 54.61,32.79 55.12,33.3 58.67,33.3 v59.44,32.66
CHA3  (via drill 0.41)
  Top 0.406: v23.75,40.28 J9.4
  Bottom 0.406: SV4.5 6.99,33.3 8.26,34.57 8.26,35.97 9.27,36.98 9.27,39.4 22.86,39.4 v23.75,40.28
CHA4  (via drill 0.41)
  Top 0.406: v8.38,39.14 11.05,41.81 J8.4
  Bottom 0.406: SV4.6 4.7,34.57 6.99,34.57 7.49,35.08 7.49,36.22 8.38,37.11 v8.38,39.14
CHA5  (via drill 0.3)
  Top 0.254: IC5.8 59.74,70.05 v60.83,71.15
  Bottom 0.254: v60.83,71.15 60.33,71.15 58.93,72.54 53.21,72.54 52.71,73.05 52.71,76.73 51.18,78.26 SV7.5
CHA6  (via drill 0.3)
  Top 0.254: IC5.42 62.37,76.24 62.23,76.1 60.33,76.1 59.44,76.99 v59.44,77.62
  Bottom 0.254: SV7.6 49.66,79.53 51.82,79.53 52.58,78.77 52.58,78 52.83,77.75 54.61,77.75 55.12,78.26 58.67,78.26 v59.44,77.62
CHA7  (via drill 0.41)
  Top 0.406: v23.75,85.24 J18.4
  Bottom 0.406: SV9.5 6.99,78.26 8.26,79.53 8.26,80.92 9.27,81.94 9.27,84.35 22.86,84.35 v23.75,85.24
CHA8  (via drill 0.41)
  Top 0.406: v8.38,84.1 11.05,86.77 J17.4
  Bottom 0.406: SV9.6 4.7,79.53 6.99,79.53 7.49,80.04 7.49,81.18 8.38,82.07 v8.38,84.1
CHA9  (via drill 0.3)
  Top 0.254: IC9.8 104.7,25.1 v105.79,26.19
  Bottom 0.254: v105.79,26.19 105.28,26.19 103.89,27.58 98.17,27.58 97.66,28.09 97.66,31.78 96.14,33.3 SV12.5
CHA10  (via drill 0.3)
  Top 0.254: IC9.42 107.33,31.28 107.19,31.14 105.28,31.14 104.39,32.03 v104.39,32.66
  Bottom 0.254: SV12.6 94.62,34.57 96.77,34.57 97.54,33.81 97.54,33.05 97.79,32.79 99.57,32.79 100.08,33.3 103.63,33.3 v104.39,32.66
CHB1  (via drill 0.3)
  Top 0.254: IC1.9 59.83,24.3 60.83,25.3 v61.72,25.3
  Bottom 0.254: SV1.7 51.69,30.76 52.2,30.25 52.2,27.84 52.96,27.08 58.67,27.08 60.33,25.43 61.6,25.43 v61.72,25.3
CHB2  (via drill 0.3)
  Top 0.254: IC1.41 63.17,33.38 v62.61,33.93 | SV1.8 49.66,32.03 53.21,32.03 53.72,32.54 53.72,33.43 v53.85,33.55
  Bottom 0.254: v62.61,33.93 62.61,33.55 62.23,33.17 61.34,33.17 59.82,34.57 53.98,34.57 53.85,34.44 v53.85,33.55
CHB3  (via drill 0.41)
  Top 0.406: v26.29,40.28 J9.3
  Bottom 0.406: SV4.7 6.99,30.76 9.78,33.55 9.78,35.46 11.05,36.73 11.05,37.74 12.07,38.76 23.5,38.76 25.15,40.28 v26.29,40.28
CHB4  (via drill 0.41)
  Top 0.406: v10.16,38.51 13.59,41.94 J8.3
  Bottom 0.406: SV4.8 4.7,32.03 6.99,32.03 9.02,34.06 9.02,35.71 10.16,36.86 v10.16,38.51
CHB5  (via drill 0.3)
  Top 0.254: IC5.9 59.83,69.25 60.83,70.26 v61.72,70.26
  Bottom 0.254: SV7.7 51.69,75.72 52.2,75.21 52.2,72.8 52.96,72.03 58.67,72.03 60.33,70.38 61.6,70.38 v61.72,70.26
CHB6  (via drill 0.3)
  Top 0.254: IC5.41 63.17,78.33 v62.61,78.89 | SV7.8 49.66,76.99 53.21,76.99 53.72,77.5 53.72,78.38 v53.85,78.51
  Bottom 0.254: v62.61,78.89 62.61,78.51 62.23,78.13 61.34,78.13 59.82,79.53 53.98,79.53 53.85,79.4 v53.85,78.51
CHB7  (via drill 0.41)
  Top 0.406: v26.29,85.24 J18.3
  Bottom 0.406: SV9.7 6.99,75.72 9.78,78.51 9.78,80.42 11.05,81.69 11.05,82.7 12.07,83.72 23.5,83.72 25.15,85.24 v26.29,85.24
CHB8  (via drill 0.41)
  Top 0.406: v10.16,83.46 13.59,86.89 J17.3
  Bottom 0.406: SV9.8 4.7,76.99 6.99,76.99 9.02,79.02 9.02,80.67 10.16,81.81 v10.16,83.46
CHB9  (via drill 0.3)
  Top 0.254: IC9.9 104.79,24.3 105.79,25.3 v106.68,25.3